# EAGLE board scope (EAGLE 6.5.0)
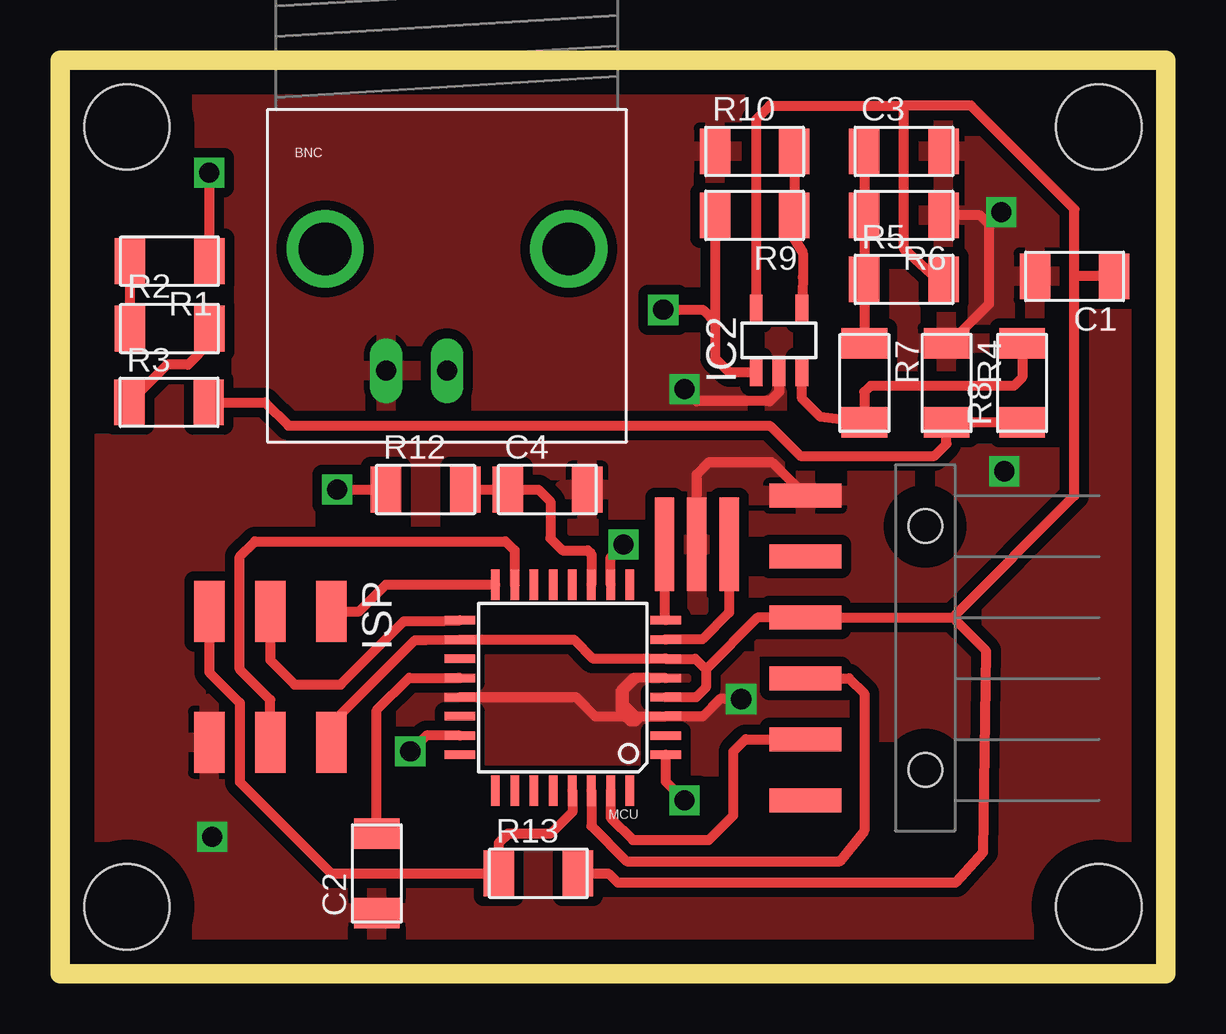
[diagram p0: board, top side]
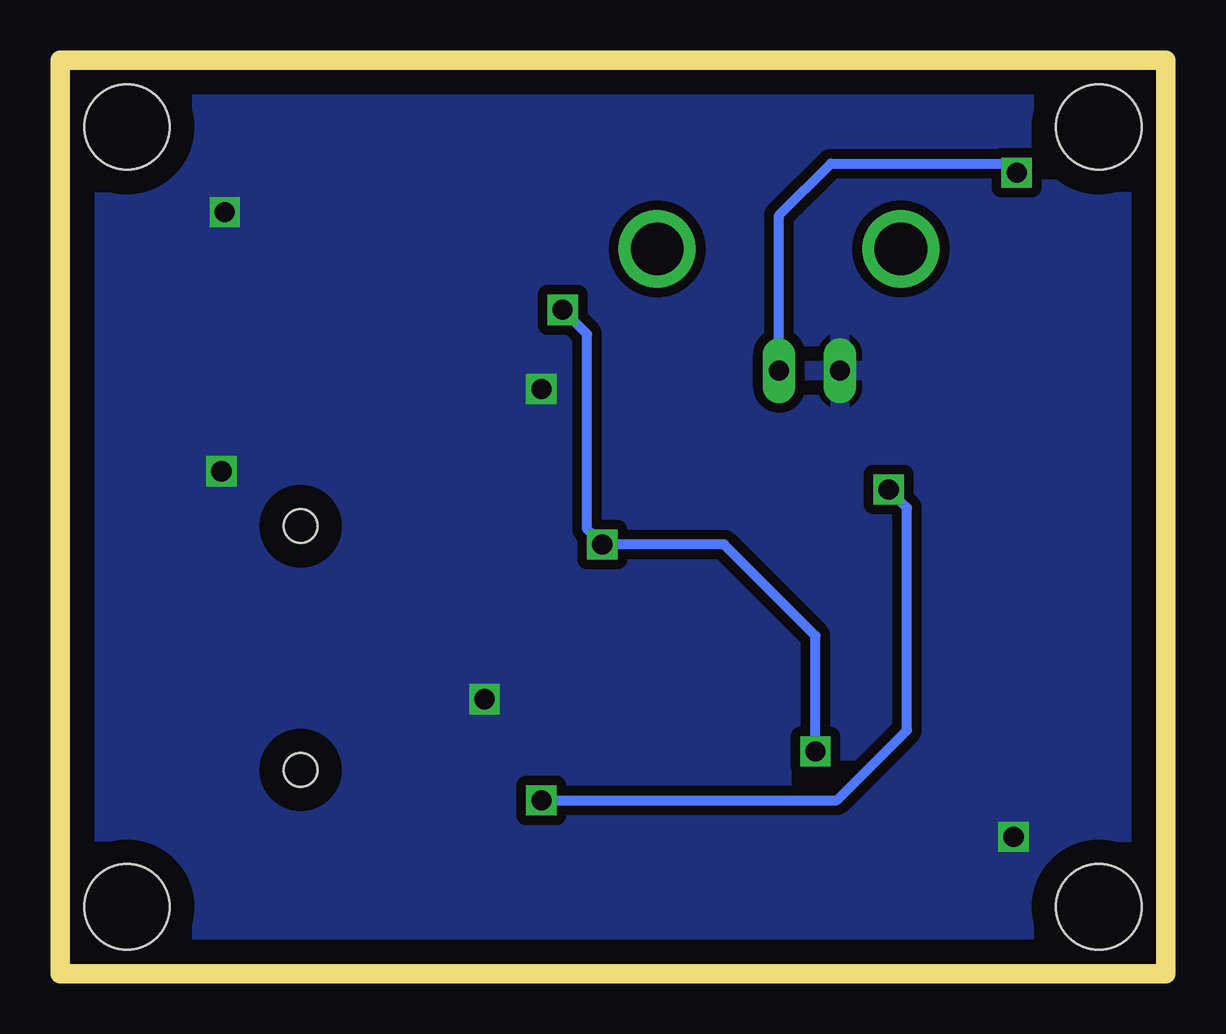
[diagram p1: board, bottom side, seen from below]

Size 46.1 x 38.1 mm. Coordinates in mm from the lower left corner, seen from the top.
Outline: 0,0 46.1,0 46.1,38.1 0,38.1 0,0
Copper layers (1*16): Top 0.035mm / dielectric 1.5mm / Bottom 0.035mm
Design rules "fab": minimum track width 0.3mm, minimum drill 32mil, track to track 0.315mm, track to pad 0.315mm, pad to pad 0.315mm, via to via 0.315mm, smd to smd 0.315mm, copper to edge 40mil, drill to drill 16mil, minimum pad ring 10mil, minimum via ring 8mil, stop-mask expansion 4mil, vias tented up to drill 0mil, thermal gap 10mil
Holes 3.56 mm at 2.79,2.79 2.79,35.31 43.31,35.31 43.31,2.79

## Footprints (pad centres in the part's own frame; a part is rotated, then mirrored left to right if it is on the bottom)
BNC = drill 2.2: 3 -5.08,5.08; 4 5.08,5.08 | drill 0.838 long: GND -2.54,0; S 0,0
C1206FAB = smd 1.27 x 1.905: 1 -1.651,0; 2 1.651,0
SOT23-5 = smd 0.533 x 1.194: 1 -0.95,-1.306; 2 0,-1.306; 3 0.95,-1.306; 4 0.95,1.306; 5 -0.95,1.306
2X3SMD = smd 2.54 x 1.27: 1 -2.54,2.54; 2 2.92,2.54; 3 -2.54,0; 4 2.92,0; 5 -2.54,-2.54; 6 2.92,-2.54
FTDI-SMD = smd 1 x 3: 1 -6.35,5; 2 -3.81,5; 3 -1.27,5; 4 1.27,5; 5 3.81,5; 6 6.35,5 | hole 1.4: -5.08,0; 5.08,0
TQFP32-08 = smd 1.27 x 0.356: 1 -4.293,2.8; 2 -4.293,2; 3 -4.293,1.2; 4 -4.293,0.4; 5 -4.293,-0.4; 6 -4.293,-1.2; 7 -4.293,-2; 8 -4.293,-2.8; 17 4.293,-2.8; 18 4.293,-2; 19 4.293,-1.2; 20 4.293,-0.4; 21 4.293,0.4; 22 4.293,1.2; 23 4.293,2; 24 4.293,2.8 | smd 0.356 x 1.27: 9 -2.8,-4.293; 10 -2,-4.293; 11 -1.2,-4.293; 12 -0.4,-4.293; 13 0.4,-4.293; 14 1.2,-4.293; 15 2,-4.293; 16 2.8,-4.293; 25 2.8,4.293; 26 2,4.293; 27 1.2,4.293; 28 0.4,4.293; 29 -0.4,4.293; 30 -1.2,4.293; 31 -2,4.293; 32 -2.8,4.293
R1206FAB = smd 1.27 x 1.905: 1 -1.651,0; 2 1.651,0
EFOBM = smd 0.8 x 3.9: 1 -1.35,0; 2 0,0; 3 1.35,0

## Placement (x,y rotation side)
BNC  BNC  [BNC]  16.13,25.15 0 top
C1  0.1uF  [C1206FAB]  42.29,29.08 180 top
C2  0.1uF  [C1206FAB]  13.21,4.19 90 top
C3  0.1uF  [C1206FAB]  35.18,34.29 0 top
C4  1uF  [C1206FAB]  20.32,20.19 0 top
IC2  OPAMP-SOT23-5  [SOT23-5]  29.97,26.42 0 top
ISP  AVRISPSMD  [2X3SMD]  8.76,12.57 270 top
JP1  FTDI  [FTDI-SMD]  36.07,13.59 90 top
MCU  ATMEGA328P  [TQFP32-08]  20.95,11.94 180 top
R1  10k  [R1206FAB]  4.57,29.72 180 top
R2  10k  [R1206FAB]  4.57,26.9 0 top
R3  10k  [R1206FAB]  4.55,23.83 0 top
R4  10k  [R1206FAB]  36.96,24.64 270 top
R5  10k  [R1206FAB]  35.18,28.96 0 top
R6  10k  [R1206FAB]  35.18,31.62 180 top
R7  10k  [R1206FAB]  33.53,24.64 270 top
R8  10k  [R1206FAB]  40.11,24.64 90 top
R9  10k  [R1206FAB]  28.96,31.62 180 top
R10  10k  [R1206FAB]  28.96,34.29 0 top
R12  10k  [R1206FAB]  15.24,20.19 0 top
R13  10k  [R1206FAB]  19.94,4.19 0 top
RESONATOR  RESONATOR  [EFOBM]  26.54,17.91 180 top

## Library data of the parts
BNC = SparkFun-Connectors
C1-C4 IC2 ISP JP1 R1-R10 R12 R13 RESONATOR = fab
MCU = SparkFun-DigitalIC; PROD_ID: IC-09069

## Nets
A0: IC2.1 MCU.10 MCU.23 R9.2
AIN1: C4.1 MCU.11 R12.2
GND: BNC.GND C1.2 C2.1 C3.2 C4.2 IC2.2 ISP.6 JP1.6 MCU.3 MCU.5 MCU.21 R4.1 R6.1 R10.1 RESONATOR.2
MISO: ISP.1 MCU.16
MOSI: ISP.4 MCU.15
N$1: MCU.7 RESONATOR.1
N$2: MCU.8 RESONATOR.3
N$3: BNC.S R1.1
N$4: C2.2 MCU.20
N$5: R1.2 R2.1
N$6: R2.2 R3.1
N$7: R3.2 R4.2 R8.1
N$9: C3.1 R5.1 R6.2 R7.1
N$10: IC2.3 R7.2 R8.2
N$11: IC2.4 R9.1 R10.2
N$12: MCU.1 R12.1
RST: ISP.5 MCU.29 R13.1
RX: JP1.3 MCU.30
SCK: ISP.3 MCU.17
TX: JP1.2 MCU.31
VCC: C1.1 IC2.5 ISP.2 JP1.4 MCU.4 MCU.6 MCU.18 R5.2 R13.2

## Tracks (layer width: path | path; a pad name or v marks a point on that pad's centre or on a via)
A0  (via drill 0.84)
  Top 0.406: 28.99,25.15 IC2.1 29.01,25.09 27.89,25.09 27.3,25.68 27.3,27.18 | 22.96,16.24 MCU.10 22.95,17.37 v23.5,17.91 | R9.2 27.3,27.18 | MCU.23 15.27,9.94 v14.61,9.27 | v25.15,27.69 26.8,27.69 27.3,27.18
  Bottom 0.406: v14.61,9.27 14.61,14.1 18.41,17.91 v23.5,17.91 24.13,18.54 24.13,26.67 v25.15,27.69
AIN1
  Top 0.406: R12.2 C4.1 19.94,20.19 20.45,19.68 20.45,18.16 20.95,17.65 22,17.65 22.15,17.5 MCU.11
GND  (via drill 0.84)
  Top 0.406: MCU.21 21.51,11.54 22.3,10.74 24,10.74 | 24,10.74 MCU.3 26.8,10.74 27.51,11.46 v28.4,11.46 | 24,10.74 23.5,11.25 23.5,11.81 24.02,12.34 MCU.5 23.89,12.34 23.37,11.81 23.37,10.92 23.75,10.54 24,10.54 24.13,10.67 24.16,10.72 | R4.1 37.08,26.29 38.73,27.94 38.73,31.24 38.35,31.62 R6.1 | IC2.2 29.97,24.26 29.59,23.88 26.54,23.88 v26.04,24.38 | RESONATOR.2 26.54,20.83 27.05,21.34 29.67,21.34 JP1.6
  other vias: 39.24,31.75 39.37,20.95 6.35,5.71
  pour Top (isolate 0.406): 0,0 46.1,0 46.1,38.1 0,38.1
  pour Bottom (isolate 0.406): 0,0 46.1,0 46.1,38.1 0,38.1
MISO
  Top 0.406: ISP.1 12.47,15.11 13.59,16.23 MCU.16
MOSI
  Top 0.406: ISP.4 8.76,11.43 7.49,12.7 7.49,17.4 8.13,18.03 18.57,18.03 18.95,17.65 MCU.15
N$1
  Top 0.406: RESONATOR.1 27.89,15.07 26.77,13.95 MCU.7
N$2
  Top 0.406: RESONATOR.3 25.19,14.79 MCU.8
N$3  (via drill 0.84)
  Top 0.406: v6.22,33.4 R1.1
  Bottom 0.406: BNC.S 16.13,31.62 13.97,33.78 6.6,33.78 v6.22,33.4
N$4
  Top 0.406: C2.2 13.21,11 14.55,12.34 MCU.20
N$5
  Top 0.406: R2.1 R1.2
N$6
  Top 0.406: R2.2 6.22,26.29 5.33,25.4 4.47,25.4 R3.1
N$7
  Top 0.406: R8.1 R4.2 36.96,22.1 36.45,21.59 30.86,21.59 29.59,22.86 9.53,22.86 8.56,23.82 R3.2
N$9
  Top 0.406: C3.1 R6.2 R5.1 R7.1
N$10
  Top 0.406: IC2.3 30.94,25.09 30.94,23.98 31.7,23.22 R7.2 33.53,24.26 33.78,24.51 39.75,24.51 40.11,24.87 R8.2
N$11
  Top 0.406: R10.2 R9.1 30.61,30.63 30.96,30.05 30.96,29.03 IC2.4
N$12  (via drill 0.84)
  Top 0.406: MCU.1 25.25,8.03 v26.04,7.24 | v11.56,20.19 R12.1
  Bottom 0.406: v26.04,7.24 13.72,7.24 10.79,10.16 10.79,19.43 v11.56,20.19
RST
  Top 0.406: ISP.5 6.22,12.57 7.49,11.3 7.49,8 11.3,4.19 R13.1 18.29,5.46 18.67,5.84 20.45,5.84 21.36,6.75 MCU.29
RX
  Top 0.406: MCU.30 22.16,6.17 23.62,4.7 32.51,4.7 33.53,5.97 33.53,11.68 32.89,12.32 JP1.3
SCK
  Top 0.406: ISP.3 8.76,13.08 9.78,12.06 11.7,12.06 14.35,14.71 16,14.71 16.15,14.73 MCU.17
TX
  Top 0.406: MCU.31 22.95,6.51 23.88,5.59 27.05,5.59 28.07,6.6 28.07,9.27 28.57,9.78 JP1.2
VCC
  Top 0.406: IC2.5 29.02,35.63 29.59,36.2 35.18,36.2 35.18,36.07 | R5.2 36.58,28.96 35.18,30.23 35.18,36.07 | ISP.2 11.56,10.67 14.81,13.92 15.25,13.92 MCU.18 21.42,13.94 22.2,13.16 25.23,13.16 MCU.6 26.49,13.14 26.92,12.7 | R13.2 22.86,4.19 23.24,3.81 37.34,3.81 38.48,5.08 38.61,13.46 37.21,14.86 | 37.21,14.86 JP1.4 29.08,14.86 26.92,12.7 | 37.21,14.86 42.29,19.94 42.29,29.21 | 42.29,29.21 42.29,31.88 37.97,36.2 35.31,36.2 35.18,36.07 | 26.92,12.7 26.92,11.94 26.52,11.53 MCU.4 | C1.1 42.42,29.08 42.29,29.21